# Altium PCB board_2.PcbDoc (part 2 of 4)
Units mm, origin at the board's own origin, x right, y up, seen from the top; angles counter-clockwise.
Board outline 144.25 x 129 mm, 8 copper layers (Top Layer, PWR, Layer2, Layer3, Layer4, Layer5, GND, Bottom Layer); 112 components, 273 nets, 1028 pads, 798 vias.
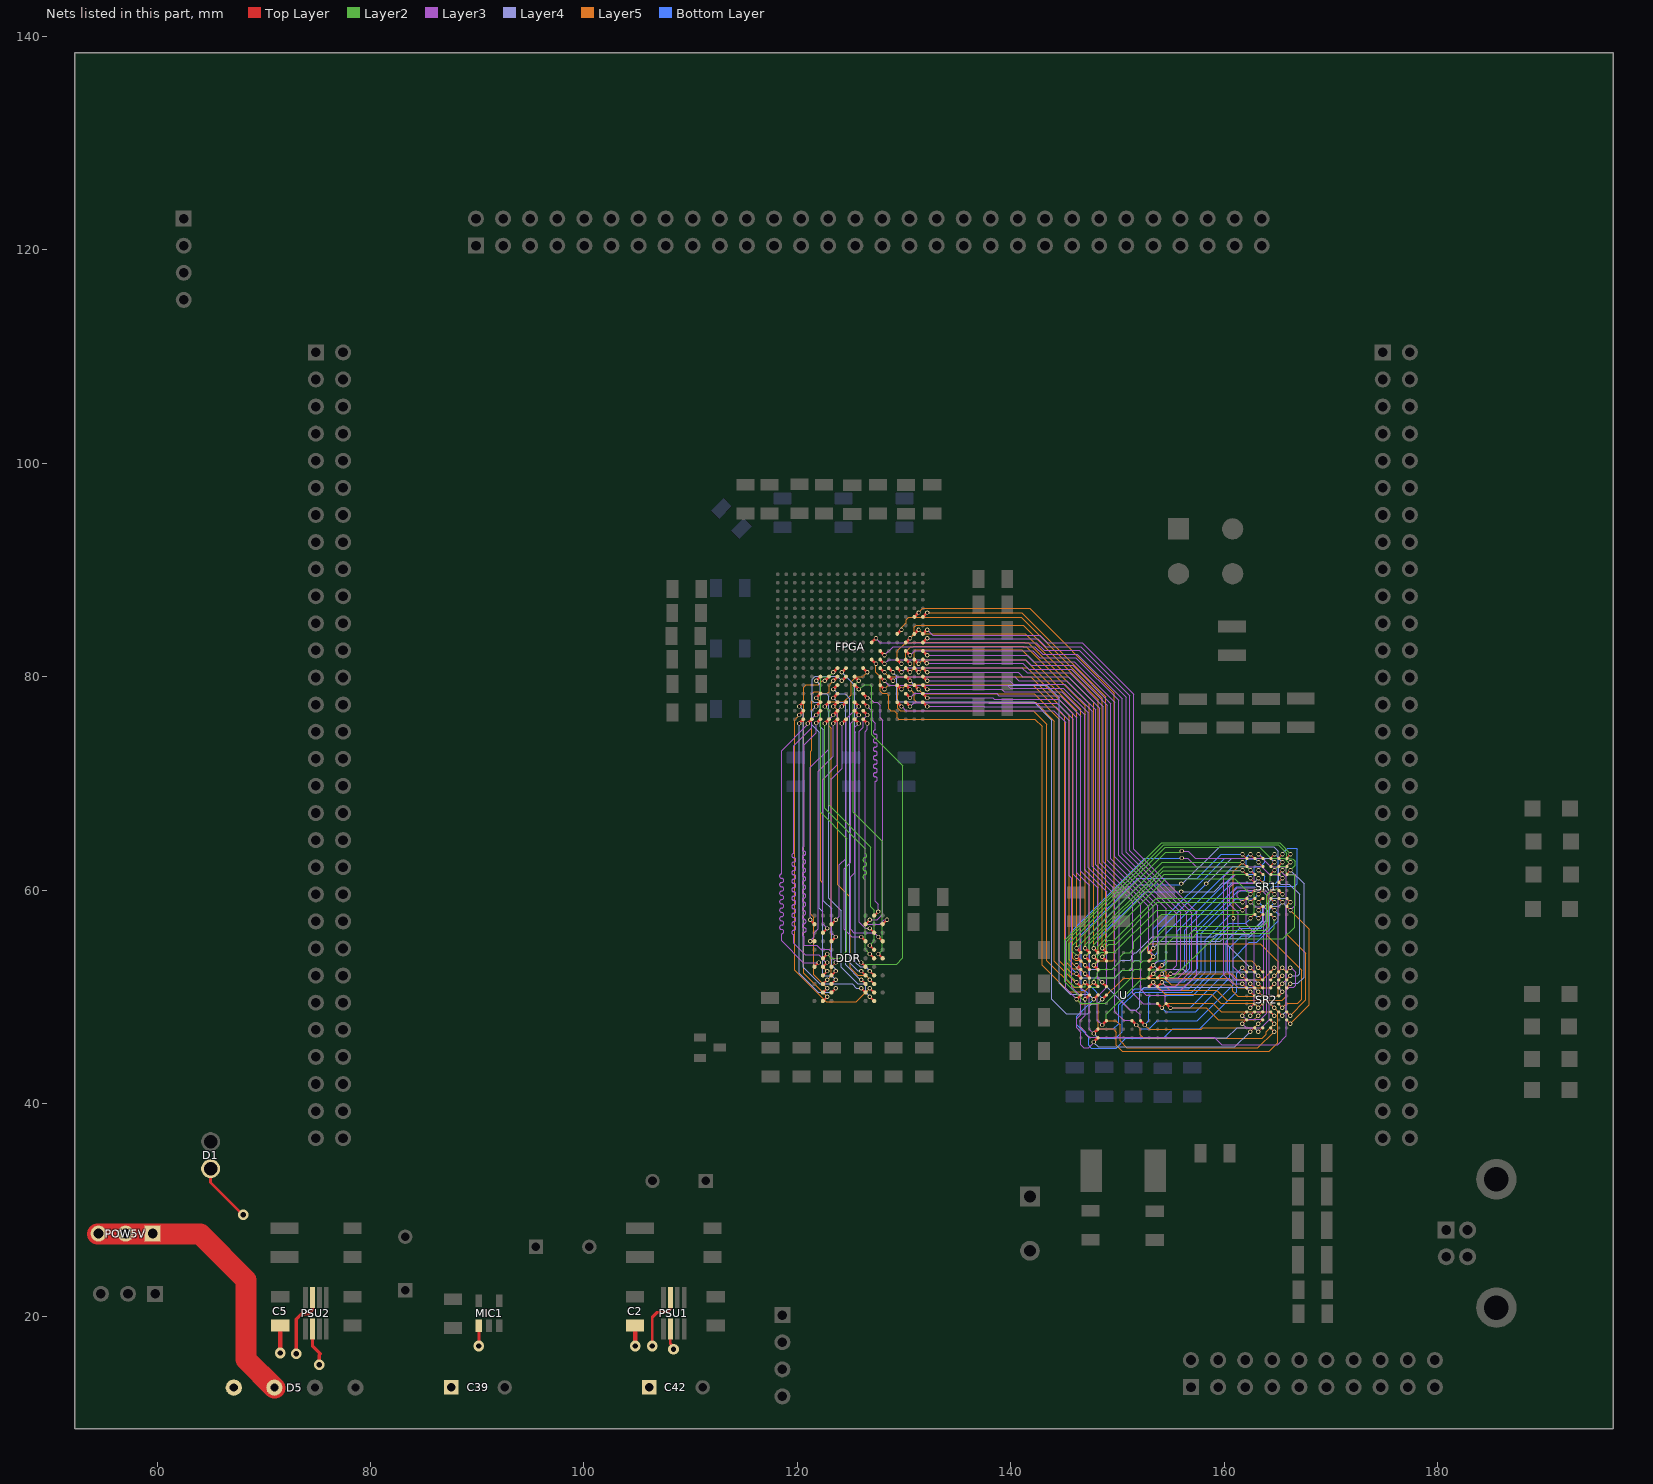
[diagram p8: the nets of this part, all layers, seen from the top]

## Via types
v1: diameter 0.4, hole 0.25, Top Layer to Bottom Layer, tented top, 553 vias
v2: diameter 1, hole 0.5, Top Layer to Bottom Layer, 222 vias
v3: diameter 1.27, hole 0.5, Top Layer to Bottom Layer, 12 vias
v4: diameter 0.4, hole 0.25, Top Layer to Bottom Layer, 7 vias
v5: diameter 7, hole 5, Top Layer to Bottom Layer, 4 vias

## Nets (pads, with @x,y where several pads share a name; then routed paths per layer and width w, separated by ;. In a path a pad name is that pad's centre, name@x,y a point inside that pad or via, vN(x,y) a via of type N, cw(c..) or ccw(c..) an arc to the next point about the centre after c; other vN are vias at no path point) (continued)
5V0: C2.2 C5.2 C39.1 C42.1 D1.1 D5.1 MIC1.1 PSU1.2 PSU1.7 PSU2.2 PSU2.7 | length 29.8
  Top Layer w0.254: D1.1@65,33.88 65,32.6 v2(68.05,29.55) ; v2(106.4,17.25) 106.4,19.95 106.869,20.419 107.833,20.419 108.056,20.642 108.056,21.481 PSU1.7@108.1,21.525 ; PSU1.2@108.1,19.125 108.1,17.475 108.35,17.225 108.4,17.175 v2(108.4,16.95)
  Top Layer w0.305: v2(73.025,16.525) 73.025,19.775 73.507,20.256 74.181,20.256 74.55,20.625 PSU2.7@74.55,21.525 ; PSU2.2@74.55,19.125 74.55,17.275 75.3,16.525 75.175,16.4 v2(75.175,15.5) ; v2(90.15,17.25) MIC1.1@90.15,19.15
  Top Layer w0.4: v2@71.5,16.625 71.525,16.65 C5.2@71.525,19.175 ; v2(104.8,17.25) C2.2@104.8,19.175
  other v2: 71.525,16.6
5V0_AC: D5.2 POW5V.1 POW5V.2 POW5V.3 | length 26.9
  Top Layer w2: POW5V.3@54.4,27.75 64.025,27.75 68.325,23.45 68.325,16 D5.2@70.975,13.35 D5.2@71,13.325
ADDR0: FPGA.V5 SR1.A3 SR2.A3 U.J4 | length 89.9
  Top Layer w0.1: SR2.A3@164.325,47.1 v1(164.7,46.725) ; SR1.A3@164.35,57.725 v1(164.725,57.35)
  Top Layer w0.254: FPGA.V5@131.768,79.204 v1(132.168,78.804) ; v1(148.575,47.35) U.J4@148.975,47.75
  Layer3 w0.1: v1(132.168,78.804) 139.171,78.804 139.401,78.574 144.793,78.574 146.92,76.447 146.92,61.922 149.025,59.817 149.025,50.9 148.125,50 148.125,47.8 v1(148.575,47.35)
  Layer2 w0.1: v1(148.575,47.35) 148.95,47.725 148.95,48.35 152.3,51.7 152.675,51.7 152.975,52 152.975,52.35 153.15,52.525 154.375,52.525 154.575,52.725 154.575,54.85 155.25,55.525 157.05,55.525 157.45,55.925 164.225,55.925 164.725,56.425 v1(164.725,57.35)
  Layer5 w0.1: v1@148.6,47.325 149.025,47.75 149.85,47.75 150.25,47.35 150.25,45.85 150.9,45.2 163.175,45.2 v1(164.7,46.725)
ADDR1: FPGA.V4 SR1.A4 SR2.A4 U.K3 | length 86.5
  Top Layer w0.1: v1(163.2,46.725) SR2.A4@163.575,47.1 ; v1(163.225,57.35) SR1.A4@163.6,57.725
  Top Layer w0.254: FPGA.V4@131.768,78.404 v1(132.168,78.004) ; v1(147.775,46.55) U.K3@148.175,46.95
  Layer3 w0.1: v1(132.168,78.004) 138.321,78.004 138.459,77.866 144.5,77.866 146.212,76.154 146.212,61.629 147.375,60.466 147.375,46.95 v1(147.775,46.55)
  Layer4 w0.1: v1(147.775,46.55) 148.175,46.15 160.275,46.15 161.225,47.1 162.825,47.1 v1@163.225,46.7
  Bottom Layer w0.1: v1@147.75,46.625 148.1,46.975 149.625,46.975 150.125,47.475 150.125,49.225 151.625,50.725 156.675,50.725 158.225,52.275 158.225,55.3 160.65,57.725 162.85,57.725 v1(163.225,57.35)
ADDR2: FPGA.V3 SR1.A5 SR2.A5 U.L3 | length 86.9
  Top Layer w0.1: v1(162.45,46.725) SR2.A5@162.825,47.1 ; v1(162.475,57.35) SR1.A5@162.85,57.725
  Top Layer w0.254: FPGA.V3@131.768,77.604 v1(132.168,77.204) ; v1(147.775,45.75) U.L3@148.175,46.15
  Layer3 w0.1: v1(132.168,77.204) 137.471,77.204 137.517,77.158 144.206,77.158 145.504,75.86 145.504,61.335 145.725,61.114 145.725,50.875 146.575,50.025 146.575,48.325 146.175,47.925 146.175,47.075 146.575,46.675 146.575,45.5 146.85,45.225 147.325,45.225 v1@147.825,45.725
  Layer4 w0.1: v1@147.75,45.75 148.2,45.3 161.025,45.3 v1(162.45,46.725)
  Bottom Layer w0.1: v1(147.775,45.75) 147.85,45.75 148.225,46.125 149.85,46.125 150.45,46.725 150.45,49.175 151.7,50.425 156.95,50.425 158.775,52.25 158.775,55.15 160.5,56.875 162.025,56.875 v1@162.5,57.35
ADDR3: FPGA.N6 SR1.B3 SR2.B3 U.J7 | length 88.8
  Top Layer w0.1: SR2.B3@164.325,47.85 v1(164.7,47.475) ; SR1.B3@164.35,58.475 v1(164.725,58.1)
  Top Layer w0.254: FPGA.N6@127.768,80.004 v1(128.168,79.604) ; U.J7@151.375,47.75 v1(151.775,47.35)
  Layer3 w0.1: v1(128.168,79.604) 128.572,79.2 139.675,79.2 139.947,78.928 144.939,78.928 147.274,76.593 147.274,62.068 149.775,59.567 149.775,48.6 150.575,47.8 151.325,47.8 v1(151.775,47.35)
  Layer5 w0.1: v1(151.775,47.35) 152.125,47 152.125,46.425 152.45,46.1 163.575,46.1 163.975,46.5 163.975,46.725 v1@164.7,47.45
  Bottom Layer w0.1: v1(151.775,47.35) 152.15,46.975 153,46.975 153.75,47.725 157.475,47.725 160.85,51.1 160.85,53.575 162.375,55.1 163.075,55.1 165.075,57.1 165.075,57.75 v1(164.725,58.1)
ADDR4: FPGA.V6 SR1.B4 SR2.B4 U.J8 | length 81
  Top Layer w0.1: v1(163.2,47.475) SR2.B4@163.575,47.85 ; v1(163.225,58.1) SR1.B4@163.6,58.475
  Top Layer w0.254: FPGA.V6@131.768,80.004 v1(132.168,79.604) ; U.J8@152.175,47.75 v1(152.575,47.35)
  Layer3 w0.1: v1(132.168,79.604) 139.896,79.604 140.218,79.282 145.086,79.282 147.628,76.74 147.628,62.215 150.175,59.668 150.175,49.775 151.163,48.787 151.637,48.787 152.125,48.3 152.125,47.8 v1(152.575,47.35)
  Layer5 w0.1: v1@152.575,47.325 152.975,46.925 157.875,46.925 158.025,47.075 162.8,47.075 v1(163.2,47.475)
  Bottom Layer w0.1: v1(152.575,47.35) 152.95,47.725 152.95,49.95 153.125,50.125 157.1,50.125 159.225,52.25 159.225,55.25 160.6,56.625 163.175,56.625 163.725,57.175 163.725,57.675 v1@163.275,58.125
ADDR5: FPGA.P6 SR1.C3 SR2.C3 U.G10 | length 82.6
  Top Layer w0.1: SR1.C3@164.35,59.225 v1(164.725,58.85) ; SR2.C3@164.363,48.562 v1(164.7,48.225)
  Top Layer w0.254: FPGA.P6@128.568,80.004 v1(128.968,79.604) ; U.G10@153.775,49.35 v1(154.175,48.95)
  Layer3 w0.1: v1(128.968,79.604) 129.368,80.004 140.371,80.004 140.739,79.636 145.233,79.636 147.982,76.887 147.982,62.362 151.425,58.919 151.425,50.325 152.425,49.325 153.8,49.325 v1(154.175,48.95)
  Layer5 w0.1: v1(154.175,48.95) 154.6,49.375 158.925,49.375 159.725,48.575 164.35,48.575 v1@164.675,48.25
  Bottom Layer w0.1: v1(154.175,48.95) v1@154.175,48.975 ; v1@154.2,48.925 154.525,48.6 157.35,48.6 160.525,51.775 160.525,54.6 161.65,55.725 163.35,55.725 164.3,56.675 164.3,58.4 v1@164.725,58.825
ADDR6: FPGA.V7 SR1.C4 SR2.C4 U.G11 | length 76.7
  Top Layer w0.1: v1(163.2,48.225) SR2.C4@163.575,48.6 ; v1(163.225,58.85) SR1.C4@163.6,59.225
  Top Layer w0.254: FPGA.V7@131.768,80.804 v1(132.168,80.404) ; U.G11@154.575,49.35 v1(154.975,48.95)
  Layer3 w0.1: v1(132.168,80.404) 140.721,80.404 141.135,79.99 145.379,79.99 148.336,77.033 148.336,62.508 152.175,58.669 152.175,50.675 152.7,50.15 154.325,50.15 154.5,49.975 154.5,49.425 v1(154.975,48.95)
  Layer5 w0.1: v1(154.975,48.95) 158.325,48.95 159.45,47.825 162.8,47.825 v1(163.2,48.225)
  Bottom Layer w0.1: v1(154.975,48.95) 156.85,48.95 160.225,52.325 160.225,55.175 161.45,56.4 163.425,56.4 164.075,57.05 164.075,58.075 v1@163.275,58.875
ADDR7: FPGA.V11 SR1.D4 SR2.D4 U.E9 | length 84.4
  Top Layer w0.1: v1(163.2,48.975) SR2.D4@163.575,49.35 ; v1(163.225,59.6) SR1.D4@163.6,59.975
  Top Layer w0.254: FPGA.V11@131.768,84.004 v1(132.168,84.404) ; U.E9@152.975,50.95 v1(153.375,51.35)
  Layer3 w0.1: v1(132.168,84.404) 132.672,83.9 142.702,83.9 143.426,83.176 146.699,83.176 151.522,78.353 151.522,63.828 157.425,57.925 157.425,52.075 155.95,50.6 153.95,50.6 153.375,51.175 v1(153.375,51.35)
  Layer5 w0.1: v1(153.375,51.35) 154.5,50.225 158.85,50.225 159.7,49.375 162.85,49.375 v1@163.25,48.975
  Bottom Layer w0.1: v1@153.375,51.325 153.75,50.95 156.375,50.95 157.85,52.425 157.85,55.95 161.1,59.2 162.825,59.2 v1(163.225,59.6)
ADDR8: FPGA.V10 SR1.H2 SR2.H2 U.E10 | length 94
  Top Layer w0.1: SR2.H2@165.075,52.35 v1(165.45,52.725) ; SR1.H2@165.1,62.975 v1(165.475,63.35)
  Top Layer w0.254: FPGA.V10@131.768,83.204 v1(132.168,83.604) ; U.E10@153.775,50.95 v1(154.175,51.35)
  Layer3 w0.1: v1(132.168,83.604) 132.226,83.546 142.555,83.546 143.279,82.822 146.552,82.822 151.168,78.206 151.168,63.681 156.975,57.874 156.975,52.5 155.45,50.975 154.55,50.975 v1(154.175,51.35)
  Layer5 w0.1: v1(154.175,51.35) 154.9,50.625 159.3,50.625 160.275,49.65 165.475,49.65 165.8,49.975 165.8,52.4 v1@165.475,52.725
  Bottom Layer w0.1: v1(154.175,51.35) 154.225,51.4 156.275,51.4 157.525,52.65 157.525,56.125 161.35,59.95 164.175,59.95 164.575,60.35 166.625,60.35 166.875,60.6 166.875,63.825 166.8,63.9 165.95,63.9 v1@165.425,63.375
ADDR9: FPGA.N9 SR1.H3 SR2.H3 U.D11 | length 84.2
  Top Layer w0.1: SR2.H3@164.325,52.35 v1(164.7,52.725) ; SR1.H3@164.35,62.975 v1(164.725,63.35)
  Top Layer w0.254: FPGA.N9@127.768,82.404 v1(128.168,82.004) ; U.D11@154.575,51.75 v1(154.975,52.15)
  Layer3 w0.1: v1(128.168,82.004) 128.989,82.825 142.275,82.825 142.986,82.114 146.259,82.114 150.46,77.913 150.46,63.388 155.925,57.923 155.925,52.65 155.425,52.15 v1(154.975,52.15)
  Layer5 w0.1: v1(154.975,52.15) 160.75,52.15 161.3,51.6 163.65,51.6 v1@164.775,52.725
  Bottom Layer w0.1: v1(154.975,52.15) 156.25,52.15 156.775,52.675 156.775,55.9 161.175,60.3 163.7,60.3 164.05,60.65 164.825,60.65 165.075,60.9 165.075,63.075 v1@164.775,63.375
ADDR10: FPGA.V9 SR1.H4 SR2.H4 U.C10 | length 74.4
  Top Layer w0.1: v1(163.2,52.725) SR2.H4@163.575,52.35 ; v1(163.225,63.35) SR1.H4@163.6,62.975
  Top Layer w0.254: FPGA.V9@131.768,82.404 v1(132.168,82.004) ; U.C10@153.775,52.55 v1(154.175,52.95)
  Layer3 w0.1: v1(132.168,82.004) 141.546,82.004 142.144,81.406 145.966,81.406 149.752,77.62 149.752,63.095 154.6,58.247 154.6,53.375 v1(154.175,52.95)
  Layer5 w0.1: v1(154.175,52.95) 154.575,53.35 162.575,53.35 v1(163.2,52.725)
  Bottom Layer w0.1: v1(154.175,52.95) 154.375,52.95 154.775,53.35 155.475,53.35 155.6,53.475 155.6,56.125 160.95,61.475 162.7,61.475 162.825,61.6 162.825,62.125 162.95,62.25 163.425,62.25 163.8,62.625 163.8,62.875 v1@163.275,63.4
ADDR11: FPGA.V8 SR1.H5 SR2.H5 U.A9 | length 69.2
  Top Layer w0.1: v1(162.45,52.725) SR2.H5@162.825,52.35 ; v1(162.475,63.35) SR1.H5@162.85,62.975
  Top Layer w0.254: FPGA.V8@131.768,81.604 v1(132.122,81.25) ; U.A9@152.975,54.15 v1(153.375,54.55)
  Layer3 w0.1: v1(132.122,81.25) 141.151,81.25 141.703,80.698 145.673,80.698 149.044,77.327 149.044,62.802 153.375,58.471 v1(153.375,54.55)
  Layer4 w0.1: v1(153.375,54.55) 153.8,54.975 160.225,54.975 v1@162.475,52.725
  Bottom Layer w0.1: v1(153.375,54.55) 153.375,56.3 160.075,63 162,63 162.375,63.375 v1@162.475,63.375
ADDR12: FPGA.R7 SR1.G3 SR2.G3 U.B9 | length 80.6
  Top Layer w0.1: SR2.G3@164.325,51.6 v1(164.7,51.975) ; SR1.G3@164.35,62.225 v1(164.725,62.6)
  Top Layer w0.254: FPGA.R7@129.368,80.804 v1(129.768,80.404) ; U.B9@152.975,53.35 v1(153.375,53.75)
  Layer3 w0.1: v1(129.768,80.404) 130.214,80.85 141.05,80.85 141.556,80.344 145.526,80.344 148.69,77.18 148.69,62.655 152.925,58.42 152.925,54.375 153.375,53.925 v1(153.375,53.75)
  Layer5 w0.1: v1@153.375,53.725 152.85,54.25 152.85,54.775 153.05,54.975 163.4,54.975 165.1,53.275 165.1,52.325 v1@164.75,51.975
  Layer4 w0.1: v4@158.325,60.45 v4@158.325,60.55 ; v4@158.375,60.5 158.375,60.65 160.7,62.975 164.35,62.975 v1@164.75,62.575
  Bottom Layer w0.1: v1(153.375,53.75) 153.825,54.2 153.825,56.1 158.275,60.55 v4@158.325,60.55
  other v4: 158.325,60.6
ADDR13: FPGA.N8 SR1.G4 SR2.G4 U.C9 | length 77.9
  Top Layer w0.1: v1(163.2,51.975) SR2.G4@163.575,51.6 ; v1(163.225,62.6) SR1.G4@163.6,62.225
  Top Layer w0.254: FPGA.N8@127.768,81.604 v1(128.168,81.204) ; U.C9@152.975,52.55 v1(153.375,52.95)
  Layer3 w0.1: v1(128.168,81.204) 128.568,81.604 141.396,81.604 141.948,81.052 145.819,81.052 149.398,77.473 149.398,62.948 153.8,58.546 153.8,53.375 v1(153.375,52.95)
  Layer4 w0.1: v1@153.4,52.95 153.775,52.575 156.175,52.575 156.4,52.35 162.825,52.35 v1(163.2,51.975)
  Bottom Layer w0.1: v1(153.375,52.95) 153.8,53.375 154.4,53.375 154.575,53.55 154.575,55.95 160.85,62.225 161.975,62.225 162.1,62.35 162.1,62.8 162.25,62.95 162.925,62.95 v1@163.275,62.6
ADDR14: FPGA.T9 SR1.F3 SR2.F3 U.D9 | length 88.9
  Top Layer w0.1: SR2.F3@164.325,50.85 SR2.F3@164.338,50.863 ; SR1.F3@164.35,61.475 v1(164.725,61.85) ; SR2.F3@164.375,50.825 164.375,50.875 v1@164.725,51.225
  Top Layer w0.254: FPGA.T9@130.168,82.404 v1(130.568,82.004) ; U.D9@152.975,51.75 v1(153.375,52.15)
  Layer3 w0.1: v1(130.568,82.004) 130.989,82.425 142.075,82.425 142.74,81.76 146.112,81.76 150.106,77.766 150.106,63.241 155.55,57.797 155.55,52.95 155.175,52.575 153.8,52.575 v1(153.375,52.15)
  Layer2 w0.1: v1(153.375,52.15) 153.725,51.8 155.3,51.8 158.925,55.425 165.525,55.425 166.625,56.525 166.625,61.4 166.575,61.45 166.075,61.45 165.85,61.675 165.85,62.175 165.8,62.225 165.1,62.225 v1@164.75,61.875
  Layer5 w0.1: v1(153.375,52.15) 153.75,52.525 154.35,52.525 154.6,52.275 154.6,52.025 154.9,51.725 160.475,51.725 160.925,51.275 161.35,50.85 164.325,50.85 v1(164.7,51.225)
  Bottom Layer w0.1: v1@164.65,61.825 v1@164.75,61.825
ADDR15: FPGA.M10 SR1.F4 SR2.F4 U.D10 | length 84.4
  Top Layer w0.1: v1(163.2,51.225) SR2.F4@163.575,50.85 ; v1(163.225,61.85) SR1.F4@163.6,61.475
  Top Layer w0.254: FPGA.M10@126.968,83.204 v1(127.368,83.604) ; U.D10@153.775,51.75 v1(154.175,52.15)
  Layer3 w0.1: v1(127.368,83.604) 127.78,83.192 142.409,83.192 143.133,82.468 146.406,82.468 150.814,78.06 150.814,63.535 156.5,57.849 156.5,52.55 155.725,51.775 154.55,51.775 v1(154.175,52.15)
  Layer4 w0.1: v1@154.175,52.15 154.75,51.575 162.85,51.575 v1(163.2,51.225)
  Bottom Layer w0.1: v1(154.175,52.15) 154.575,52.55 156.025,52.55 156.325,52.85 156.325,56.25 160.775,60.7 163.55,60.7 163.825,60.975 163.825,61.3 v1@163.25,61.875
ADDR16: FPGA.T4 SR1.E4 SR2.E4 U.E4 | length 84.3
  Top Layer w0.1: v1(163.2,50.475) SR2.E4@163.575,50.1 ; v1(163.225,61.1) SR1.E4@163.6,60.725
  Top Layer w0.254: FPGA.T4@130.168,78.404 v1(130.568,78.004) ; v1(148.575,51.35) U.E4@148.975,50.95
  Layer3 w0.1: v1(130.568,78.004) 130.989,78.425 138.675,78.425 138.88,78.22 144.646,78.22 146.566,76.3 146.566,61.775 148.15,60.191 148.15,51.775 v1(148.575,51.35)
  Layer4 w0.1: v1@148.55,51.4 151.2,48.75 151.775,48.75 152.075,49.05 152.075,50.45 152.5,50.875 162.8,50.875 v1@163.25,50.425 ; v4(156,59.85) 159.075,59.85 159.25,60.025 159.9,60.675 ; 159.9,60.7 162.825,60.7 v1(163.225,61.1)
  Bottom Layer w0.1: v1(148.575,51.35) 148.175,51.75 148.175,55.425 152.6,59.85 v4@155.975,59.85
ADDR17: FPGA.R3 SR1.D3 SR2.D3 U.F1 | length 97
  Top Layer w0.1: SR2.D3@164.325,49.35 v1(164.7,48.975) ; SR1.D3@164.35,59.975 v1(164.725,59.6)
  Top Layer w0.254: FPGA.R3@129.368,77.604 v1(129.768,77.204) ; v1(146.175,49.75) U.F1@146.575,50.15
  Layer3 w0.1: v1(129.768,77.204) 130.168,76.804 144.06,76.804 145.15,75.714 145.15,50.775 v1(146.175,49.75)
  Layer2 w0.1: v1(146.175,49.75) 146.55,49.375 148.9,49.375 151.225,51.7 ; 151.2,51.675 151.4,51.875 151.4,52.3 151.65,52.55 152.1,52.55 152.2,52.65 152.2,53.125 152.425,53.35 153.675,53.35 153.825,53.5 153.825,55.025 154.625,55.825 156.1,55.825 ; 156.125,55.825 156.725,55.825 157.15,56.25 163.9,56.25 164.2,56.55 164.2,59.05 v1@164.725,59.575
  Layer5 w0.1: v1@146.2,49.7 146.55,49.35 148.1,49.35 148.225,49.225 148.225,47.125 148.375,46.975 149.625,46.975 149.912,46.688 149.912,45.438 150.475,44.875 164.225,44.875 165.05,45.7 165.05,48.65 v1@164.7,49
ADDR18: FPGA.T3 SR1.H1 SR2.H1 U.F2 | length 107.5
  Top Layer w0.1: SR2.H1@165.825,52.35 v1(166.2,52.725) ; SR1.H1@165.85,62.975 v1(166.225,63.35)
  Top Layer w0.254: FPGA.T3@130.168,77.604 v1(130.568,77.204) ; v1(146.975,49.75) U.F2@147.375,50.15
  Layer3 w0.1: v1(130.568,77.204) 130.939,77.575 137.9,77.575 137.963,77.512 144.353,77.512 145.858,76.007 145.858,61.482 146.525,60.815 146.525,50.9 146.975,50.45 v1(146.975,49.75) 146.975,48.25 146.5,47.775 146.5,47.2 147.025,46.675 147.025,46.475 147.325,46.175 159.1,46.175 159.775,45.5 165.025,45.5 165.85,46.325 165.85,50.625 166.1,50.875 166.55,50.875 166.725,51.05 166.725,52.275 v1@166.2,52.8
  Layer2 w0.1: v1(146.975,49.75) 146.7,49.75 145.05,51.4 145.05,55.3 154.175,64.425 165.2,64.425 v1@166.25,63.375
ADDR19: FPGA.T6 SR1.H6 SR2.H6 U.F3 | length 96.4
  Top Layer w0.1: v1(161.7,52.725) SR2.H6@162.075,52.35 ; v1(161.725,63.35) SR1.H6@162.1,62.975
  Top Layer w0.254: FPGA.T6@130.168,80.004 v1(130.568,79.604) ; v1(147.775,49.75) U.F3@148.175,50.15
  Layer4 w0.1: v1(130.568,79.604) 130.972,79.2 143.375,79.2 144.55,78.025 144.55,51.275 145.6,50.225 147.325,50.225 v1@147.75,49.8
  Bottom Layer w0.1: 146.2,47.375 147.325,46.25 147.325,45.425 147.575,45.175 149.875,45.175 150.8,46.1 154.3,46.1 155.2,47 157.7,47 161.175,50.475 161.175,52.2 v1(161.7,52.725) ; 146.2,47.4 146.2,48.175 v1(147.775,49.75) 146.925,50.6 146.625,50.6 146.625,55.8 151.95,61.125 157.475,61.125 159.725,63.375 v1@161.75,63.375
ADDR20: FPGA.P7 SR1.G2 SR2.G2 U.F4 | length 101.9
  Top Layer w0.1: SR2.G2@165.075,51.6 v1(165.45,51.975) ; SR1.G2@165.1,62.225 v1(165.475,62.6)
  Top Layer w0.254: FPGA.P7@128.568,80.804 v1(128.968,80.404) ; v1(148.575,49.75) U.F4@148.975,50.15
  Layer5 w0.1: v1(148.575,49.75) 150.575,51.75 154.4,51.75 155.05,51.1 160.575,51.1 160.8,50.875 160.8,50.525 161.275,50.05 164.925,50.05 165.075,50.2 165.075,51.6 v1(165.45,51.975)
  Layer4 w0.1: v1(128.968,80.404) 128.968,80.382 129.325,80.025 129.325,77.825 129.525,77.625 142.15,77.625 143.85,75.925 143.85,49.75 145.2,48.4 147.225,48.4 147.375,48.55 147.375,49.125 147.6,49.35 148.175,49.35 v1(148.575,49.75) ; v4(156,60.6) 156,60.475 159.6,64.075 164.675,64.075 165.1,63.65 165.1,62.975 v1@165.5,62.575
  Bottom Layer w0.1: v1(148.575,49.75) 148.575,49.875 147.4,51.05 147.4,55.85 152.05,60.5 v4@155.875,60.5
DATA0: FPGA.V13 SR1.B6 SR2.B6 U.B4 | length 82.4
  Top Layer w0.1: v1(161.7,47.475) SR2.B6@162.075,47.85 ; v1(161.725,58.1) SR1.B6@162.1,58.475
  Top Layer w0.254: FPGA.V13@131.768,85.604 v1(132.168,86.004) ; v1(148.575,53.75) U.B4@148.975,53.35
  Layer3 w0.1: v1(161.7,47.475) 162.1,47.075 163.5,47.075 164.25,47.825 164.25,59.625 163.65,60.225 161.25,60.225 160.9,59.875 160.9,58.9 161.7,58.1 v1@161.75,58.1
  Layer2 w0.1: v1(148.575,53.75) 148.675,53.75 149.075,54.15 149.725,54.15 153.675,58.1 v1@161.75,58.1
  Layer5 w0.1: v1(132.168,86.004) 141.049,86.004 148.929,78.124 148.929,54.104 v1(148.575,53.75)
DATA1: FPGA.R11 SR1.C5 SR2.C5 U.A4 | length 76.8
  Top Layer w0.1: v1(162.45,48.225) SR2.C5@162.825,48.6 ; v1(162.475,58.85) SR1.C5@162.85,59.225
  Top Layer w0.254: FPGA.R11@129.368,84.004 v1(129.768,84.404) ; v1(148.575,54.55) U.A4@148.975,54.15
  Layer3 w0.1: v1(162.45,48.225) 162.8,48.575 163.5,48.575 163.7,48.775 163.7,58.275 163.525,58.45 162.925,58.45 v1@162.55,58.825
  Layer2 w0.1: v1(148.575,54.55) 148.575,54.725 149.125,55.275 149.7,55.275 ; 149.7,55.3 153.65,59.25 162.075,59.25 v1(162.475,58.85)
  Layer5 w0.1: v1(129.768,84.404) 129.768,84.609 130.218,85.059 130.218,85.349 130.444,85.575 140.972,85.575 148.571,77.976 148.571,54.554 v1(148.575,54.55)
DATA2: FPGA.U13 SR1.C6 SR2.C6 U.C3 | length 85.9
  Top Layer w0.1: v1(161.7,48.225) SR2.C6@162.075,48.6 ; v1(161.725,58.85) SR1.C6@162.1,59.225
  Top Layer w0.254: FPGA.U13@130.968,85.604 v1(131.368,86.004) ; v1(147.775,52.95) U.C3@148.175,52.55
  Layer3 w0.1: v1@161.725,48.225 162.075,47.875 163.45,47.875 164.025,48.45 164.025,59.5 163.525,60 161.55,60 161.225,59.675 161.225,59.35 v1(161.725,58.85)
  Layer2 w0.1: v1@147.775,52.975 148.175,53.375 148.175,53.85 148.5,54.175 148.75,54.175 148.975,54.4 148.975,54.7 149.2,54.925 149.825,54.925 153.75,58.85 v1(161.725,58.85)
  Layer5 w0.1: v1(131.368,86.004) 131.768,86.404 141.775,86.404 149.725,78.454 149.725,53.5 149.575,53.35 148.225,53.35 147.825,52.95 v1(147.775,52.95)
DATA3: FPGA.T10 SR1.D5 SR2.D5 U.B3 | length 77.8
  Top Layer w0.1: v1(162.45,48.975) SR2.D5@162.825,49.35 ; v1(162.475,59.6) SR1.D5@162.85,59.975
  Top Layer w0.254: FPGA.T10@130.168,83.204 v1(130.568,83.604) ; v1(147.775,53.75) U.B3@148.175,53.35
  Layer3 w0.1: v1(162.45,48.975) 162.825,49.35 162.825,56.062 162.1,56.787 162.1,59.275 v1@162.45,59.625
  Layer2 w0.1: v1(147.775,53.75) 148.15,54.125 148.15,54.675 154.525,61.05 161.025,61.05 v1(162.475,59.6)
  Layer5 w0.1: v1(130.568,83.604) 130.968,84.004 130.968,84.668 131.125,84.825 141.197,84.825 148.2,77.822 148.2,54.175 v1(147.775,53.75)
DATA4: FPGA.U11 SR1.E5 SR2.E5 U.A3 | length 76.6
  Top Layer w0.1: v1(162.45,50.475) SR2.E5@162.825,50.1 ; v1(162.475,61.1) SR1.E5@162.85,60.725
  Top Layer w0.254: FPGA.U11@130.968,84.004 v1(131.368,84.404) ; v1(147.775,54.55) U.A3@148.175,54.15
  Layer3 w0.1: v1@162.45,50.425 162.1,50.775 162.1,51.325 161.825,51.6 161.1,51.6 160.35,52.35 160.35,60.75 161.1,61.5 162.125,61.5 162.475,61.15 v1(162.475,61.1)
  Layer2 w0.1: v1(147.775,54.55) 147.775,54.85 154.4,61.475 162.1,61.475 v1(162.475,61.1)
  Layer5 w0.1: v1(131.368,84.404) 131.747,84.025 141.371,84.025 147.775,77.621 v1(147.775,54.55)
DATA5: FPGA.T8 SR1.F5 SR2.F5 U.A2 | length 78.1
  Top Layer w0.1: v1(162.45,51.225) SR2.F5@162.825,50.85 ; v1(162.475,61.85) SR1.F5@162.85,61.475
  Top Layer w0.254: FPGA.T8@130.168,81.604 v1(130.568,81.204) ; v1(146.975,54.55) U.A2@147.375,54.15
  Layer3 w0.1: v1(162.45,51.225) 162.45,51.425 162.1,51.775 162.1,55.85 161.35,56.6 161.35,57.85 160.55,58.65 160.55,60.25 160.925,60.625 162.675,60.625 162.85,60.8 162.85,61.525 v1@162.475,61.9
  Layer2 w0.1: v1(146.975,54.55) 146.975,54.85 154.325,62.2 162.15,62.2 v1@162.475,61.875
  Layer5 w0.1: v1(130.568,81.204) 130.175,81.597 130.175,82.35 130.65,82.825 130.888,82.825 130.917,82.854 141.162,82.854 141.191,82.825 141.44,82.825 146.975,77.29 v1(146.975,54.55)
DATA6: FPGA.R8 SR1.F6 SR2.F6 U.B2 | length 80
  Top Layer w0.1: v1(161.7,51.225) SR2.F6@162.075,50.85 ; v1(161.725,61.85) SR1.F6@162.1,61.475
  Top Layer w0.254: FPGA.R8@129.368,81.604 v1(129.768,81.204) ; v1(146.975,53.75) U.B2@147.375,53.35
  Layer3 w0.1: v1(161.7,51.225) 160.8,51.225 159.975,52.05 159.975,61.25 160.6,61.875 v1@161.75,61.875
  Layer2 w0.1: v1@146.975,53.775 147.375,54.175 147.375,54.9 154.3,61.825 161.7,61.825 v1(161.725,61.85)
  Layer5 w0.1: v1(129.768,81.204) 129.375,81.597 129.375,82.425 130.142,83.192 130.755,83.192 130.771,83.208 141.308,83.208 141.324,83.192 141.639,83.192 147.375,77.456 147.375,54.075 147.05,53.75 v1(146.975,53.75)
DATA7: FPGA.U8 SR1.G6 SR2.G6 U.A1 | length 71.6
  Top Layer w0.1: v1(161.7,51.975) SR2.G6@162.075,51.6 ; v1(161.725,62.6) SR1.G6@162.1,62.225
  Top Layer w0.254: FPGA.U8@130.968,81.604 v1(131.368,81.204) ; v1(146.175,54.55) U.A1@146.575,54.15
  Layer3 w0.1: v1(160.875,57.35) 160.875,52.8 v1(161.7,51.975)
  Layer2 w0.1: v1@146.15,54.525 154.225,62.6 v1(161.725,62.6)
  Layer5 w0.1: v1(131.368,81.204) 131.768,81.604 141.381,81.604 146.175,76.81 v1(146.175,54.55) ; v1(160.875,57.35) 160.875,61.725 v1@161.725,62.575
DATA8: FPGA.T7 SR1.B1 SR2.B1 U.B1 | length 88
  Top Layer w0.1: SR2.B1@165.825,47.85 v1(166.2,47.475) ; SR1.B1@165.85,58.475 v1(166.225,58.1)
  Top Layer w0.254: FPGA.T7@130.168,80.804 v1(130.568,80.404) ; v1(146.175,53.75) U.B1@146.575,53.35
  Layer3 w0.1: v4@156.05,63.625 156.65,63.625 157.3,62.975 163.6,62.975 164.375,62.2 165.675,62.2 165.85,62.025 165.85,61.675 166.05,61.475 166.625,61.475 166.675,61.425 166.675,58.55 v1@166.275,58.15
  Layer2 w0.1: v1(146.175,53.75) 146.175,53.875 145.775,54.275 145.775,54.775 154.525,63.525 155.9,63.525 v4(156.025,63.65)
  Layer5 w0.1: v1(130.568,80.404) 130.975,80.811 130.975,82.411 131.064,82.5 141.015,82.5 146.55,76.965 146.55,54.1 146.2,53.75 v1(146.175,53.75) ; v1(166.225,58.1) 168,56.325 168,49.25 v1@166.25,47.5
DATA9: FPGA.U7 SR1.C1 SR2.C1 U.C2 | length 78.3
  Top Layer w0.1: SR1.C1@165.85,59.225 v1(166.225,58.85) ; SR2.C1@165.863,48.562 v1(166.2,48.225)
  Top Layer w0.254: FPGA.U7@130.968,80.804 v1(131.368,80.404) ; v1(146.975,52.95) U.C2@147.375,52.55
  Layer5 w0.1: v1(131.368,80.404) 131.789,80.825 141.56,80.825 145.821,76.564 145.821,53.603 146.028,53.396 146.529,53.396 v1(146.975,52.95) ; v1(166.2,48.225) 167.675,49.7 167.675,54.075 165.875,55.875 165.875,58.575 v1@166.2,58.9
  Layer4 w0.1: v1@146.95,52.975 147.35,52.575 149.5,52.575 150.325,53.4 ; 150.3,53.4 150.325,53.4 ; v1(166.225,58.85) 165.85,59.225 164.55,59.225 163.625,58.3 163.625,57.15 162.35,55.875 159.25,55.875 159,55.625 153.275,55.625 151.775,54.125 151.625,54.125 151.35,53.85 151.35,53.55 151.2,53.4 150.325,53.4
DATA10: FPGA.N7 SR1.C2 SR2.C2 U.C1 | length 80.2
  Top Layer w0.1: SR2.C2@165.075,48.6 v1(165.45,48.225) ; SR1.C2@165.1,59.225 v1(165.475,58.85)
  Top Layer w0.254: FPGA.N7@127.768,80.804 v1(128.168,80.404) ; v1(146.175,52.95) U.C1@146.575,52.55
  Layer5 w0.1: v1(128.168,80.404) 128.572,80 141.86,80 145.467,76.393 145.467,53.457 145.974,52.95 v1(146.175,52.95)
  Layer4 w0.1: v1(146.175,52.95) 146.175,52.65 146.55,52.275 146.55,51.95 146.725,51.775 149.75,51.775 150.475,52.5 151.25,52.5 151.4,52.65 151.4,53.175 151.625,53.4 152.15,53.4 152.225,53.475 152.225,54.125 153.275,55.175 159.65,55.175 159.95,55.475 162.275,55.475 163.975,57.175 163.975,57.9 164.575,58.5 165.15,58.5 v1@165.525,58.875 ; v1@165.45,48.25 165.825,48.625 165.825,51.094 165.846,51.115 165.846,56.01 165.825,56.031 165.825,58.5 165.487,58.837 v1(165.475,58.85)
DATA11: FPGA.R5 SR1.D2 SR2.D2 U.D2 | length 85.1
  Top Layer w0.1: SR1.D2@165.1,59.975 v1(165.475,59.6) ; SR2.D2@165.112,49.312 v1(165.45,48.975)
  Top Layer w0.254: FPGA.R5@129.368,79.204 v1(129.768,78.804) ; v1(146.975,52.15) U.D2@147.375,51.75
  Layer2 w0.1: v1(146.975,52.15) 147.375,51.75 147.375,51.025 147.5,50.9 147.975,50.9 148.2,51.125 148.2,51.575 148.225,51.575 148.425,51.775 149.7,51.775 150.425,52.5 151.075,52.5 151.4,52.825 151.4,53.125 151.625,53.35 152.075,53.35 152.2,53.475 152.2,54.15 154.675,56.625 163.625,56.625 164,57 164,59.55 164.525,60.075 164.975,60.075 v1@165.475,59.575
  Layer5 w0.1: v1(129.768,78.804) 130.189,79.225 142.08,79.225 145.075,76.23 145.075,53.348 145.827,52.596 146.529,52.596 v1(146.975,52.15) ; v1(165.45,48.975) 165.875,49.4 166.925,49.4 167.275,49.75 167.275,52.475 164.05,55.7 164.05,59.525 164.625,60.1 165.025,60.1 v1@165.5,59.625
DATA12: FPGA.U5 SR1.E2 SR2.E2 U.D1 | length 79.9
  Top Layer w0.1: SR1.E2@165.1,60.725 v1(165.475,61.1) ; SR2.E2@165.125,50.05 165.45,50.375 v1(165.45,50.475)
  Top Layer w0.254: FPGA.U5@130.968,79.204 v1(131.368,78.804) ; v1(146.175,52.15) U.D1@146.575,51.75
  Layer3 w0.1: v4(156.025,63) 156.575,63 157.375,62.2 163.525,62.2 164.275,61.45 165.175,61.45 v1@165.5,61.125 ; v1(165.45,50.475) 165.1,50.825 165.1,60.725 v1@165.45,61.075
  Layer5 w0.1: v1(131.368,78.804) 131.368,78.782 131.775,78.375 142.223,78.375 144.575,76.023 144.575,53.348 145.772,52.15 v1(146.175,52.15)
  Bottom Layer w0.1: v1(146.175,52.15) 145.675,52.65 145.675,56.075 152.575,62.975 155.9,62.975 v4@156.05,63.125
DATA13: FPGA.M8 SR1.F2 SR2.F2 U.E3 | length 86.5
  Top Layer w0.1: SR2.F2@165.075,50.85 v1(165.45,51.225) ; SR1.F2@165.1,61.475 v1(165.475,61.85)
  Top Layer w0.254: FPGA.M8@126.968,81.604 v1(127.368,81.204) ; v1(147.775,51.35) U.E3@148.175,50.95
  Layer3 w0.1: v1(165.45,51.225) 165.825,51.6 165.825,61.25 165.475,61.6 v1@165.475,61.875
  Layer2 w0.1: v1(147.775,51.35) 147.775,51.6 148.125,51.95 148.125,52.25 148.45,52.575 149.5,52.575 150.262,53.337 150.262,53.737 150.65,54.125 151.15,54.125 151.55,54.525 151.55,55.15 154.15,57.75 162.675,57.75 162.825,57.9 162.825,59.925 163.219,60.319 163.844,60.319 164.35,60.825 164.35,61.35 164.5,61.5 165.15,61.5 v1@165.5,61.85
  Layer5 w0.1: v1(127.368,81.204) 127.368,80.407 127.775,80 127.775,78.625 127.975,78.425 128.375,78.425 128.575,78.225 128.575,77 128.75,76.825 129.075,76.825 129.375,76.525 129.375,76.125 129.475,76.025 142.275,76.025 142.95,75.35 142.95,52.95 145.425,50.475 146.9,50.475 v1(147.775,51.35)
DATA14: FPGA.N5 SR1.F1 SR2.F1 U.E2 | length 92.1
  Top Layer w0.1: SR2.F1@165.825,50.85 v1(166.2,51.225) ; SR1.F1@165.85,61.475 v1(166.225,61.85)
  Top Layer w0.254: FPGA.N5@127.768,79.204 v1(128.168,78.804) ; v1(146.975,51.35) U.E2@147.375,50.95
  Layer2 w0.1: v1(146.975,51.35) 146.975,50.95 145.975,50.95 145.275,51.65 145.275,55.175 154.325,64.225 165.1,64.225 165.875,63.45 165.875,63.175 166.1,62.95 166.4,62.95 166.475,62.875 166.675,62.675 166.675,62.3 v1(166.225,61.85)
  Layer5 w0.1: v1(128.168,78.804) 128.539,79.175 129.15,79.175 129.4,78.925 129.4,77.05 129.625,76.825 142.111,76.825 143.4,75.536 143.4,53.375 145.9,50.875 146.5,50.875 v1(146.975,51.35)
  Layer4 w0.1: v1@166.225,51.25 166.925,51.25 167.5,51.825 167.5,60.575 v1(166.225,61.85)
DATA15: FPGA.T5 SR1.G1 SR2.G1 U.E1 | length 85.3
  Top Layer w0.1: SR2.G1@165.825,51.6 v1(166.2,51.975) ; SR1.G1@165.85,62.225 v1(166.225,62.6)
  Top Layer w0.254: FPGA.T5@130.168,79.204 v1(130.568,78.804) ; v1(146.175,51.35) U.E1@146.575,50.95
  Layer2 w0.1: v1(146.175,51.35) 145.475,52.05 145.475,55 154.5,64.025 163.325,64.025 164.375,62.975 165.65,62.975 166.05,62.575 v1@166.225,62.575
  Layer5 w0.1: v1@130.575,78.8 130.95,78.425 130.95,77.825 131.175,77.6 142.326,77.6 144.1,75.826 144.1,53.322 146.072,51.35 v1(146.175,51.35)
  Layer4 w0.1: v1(166.2,51.975) 166.9,51.975 167.075,52.15 167.075,59.6 166.125,60.55 165.325,60.55 165.125,60.75 165.125,62.125 165.225,62.225 165.85,62.225 v1@166.275,62.65
DDR2.DDR_A0: DDR.H8 FPGA.J7 | length 30.5
  Top Layer w0.2: v1(126.8,52.4) DDR.H8@127.2,52
  Top Layer w0.254: v1(124.168,80.404) FPGA.J7@124.568,80.804
  Layer4 w0.1: v1@124.175,80.4 125.375,79.2 125.375,74.875 125.45,74.8 125.45,53.225 125.875,52.8 126.4,52.8 v1(126.8,52.4)
DDR2.DDR_A1: DDR.H3 FPGA.J6 | length 33
  Top Layer w0.2: DDR.H3@123.2,52 v1(123.6,52.4)
  Top Layer w0.254: v1(124.168,79.604) FPGA.J6@124.568,80.004
  Layer4 w0.1: v1(123.6,52.4) 123.75,52.4 123.675,52.475 123.225,52.925 123.225,58.225 122.45,59 122.45,75.025 122.15,75.325 122.15,77.45 122,77.6 121.525,77.6 121.4,77.725 121.4,79.775 121.675,80.05 123.722,80.05 v1(124.168,79.604)
DDR2.DDR_A2: DDR.H7 FPGA.H5 | length 29.3
  Top Layer w0.2: v1(126,52.4) DDR.H7@126.4,52
  Top Layer w0.254: v1(123.368,78.804) FPGA.H5@123.768,79.204
  Layer5 w0.1: v1(123.368,78.804) v1@123.446,78.804
  Layer4 w0.1: v1(123.368,78.804) 123.396,78.804 123.8,78.4 124.475,78.4 124.925,77.95 124.925,53.175 125.675,52.425 v1@125.975,52.425
DDR2.DDR_A3: DDR.J2 FPGA.L7 | length 32.9
  Top Layer w0.2: DDR.J2@122.4,51.2 v1(122.8,51.6)
  Top Layer w0.254: FPGA.L7@126.168,80.804 v1(126.568,80.404)
  Layer5 w0.1: v1@122.775,51.625 v1@122.775,51.65 ; v1(122.8,51.6) 122.85,51.6 123.2,51.95 123.2,75.15 122.95,75.4 122.95,77.475 123.1,77.625 124.35,77.625 125.05,78.325 125.05,79.525 125.5,79.975 126.139,79.975 v1(126.568,80.404)
DDR2.DDR_A4: DDR.J3 FPGA.F3 | length 28.2
  Top Layer w0.2: DDR.J3@123.2,51.2 v1(123.6,51.6)
  Top Layer w0.254: v1(121.768,77.204) FPGA.F3@122.168,77.604
  Layer4 w0.1: v1@121.75,77.2 121.375,76.825 121.375,75.5 122.075,74.8 122.075,58.275 122.375,57.975 122.375,52.15 122.55,51.975 123.225,51.975 v1(123.6,51.6)
DDR2.DDR_A5: DDR.J7 FPGA.H4 | length 29.2
  Top Layer w0.2: v1(126,51.6) DDR.J7@126.4,51.2
  Top Layer w0.254: v1(123.368,78.004) FPGA.H4@123.768,78.404
  Layer4 w0.1: v1(123.368,78.004) 123.772,77.6 124.55,77.6 124.525,77.575 124.525,52.975 125.9,51.6 v1(126,51.6)
DDR2.DDR_A6: DDR.J8 FPGA.H3 | length 28.6
  Top Layer w0.2: v1(126.8,51.6) DDR.J8@127.2,51.2
  Top Layer w0.254: v1(123.368,77.204) FPGA.H3@123.768,77.604
  Layer5 w0.1: v1@123.375,77.25 123.394,77.231 123.775,76.85 123.775,60.475 124.95,59.3 124.95,52.725 125.675,52 126.4,52 v1(126.8,51.6)
DDR2.DDR_A7: DDR.K2 FPGA.H6 | length 32.5
  Top Layer w0.2: DDR.K2@122.4,50.4 v1(122.8,50.8)
  Top Layer w0.254: v1(123.368,79.604) FPGA.H6@123.768,80.004
  Layer5 w0.1: v1(122.8,50.8) 121.55,52.05 121.55,57.425 121.25,57.725 121.25,72.987 121.35,73.087 121.35,78.375 121.575,78.6 122.175,78.6 122.325,78.45 122.825,78.45 122.975,78.6 122.975,79.211 v1(123.368,79.604) ; v1@122.825,50.8 v1@122.9,50.8
DDR2.DDR_A8: DDR.K8 FPGA.D2 | length 34
  Top Layer w0.2: v1(126.8,50.8) DDR.K8@127.2,50.4
  Top Layer w0.254: v1(120.168,76.404) FPGA.D2@120.568,76.804
  Layer5 w0.1: v1@120.225,76.35 120.168,76.35 120.125,76.35 119.75,75.975 119.75,52.5 122.725,49.525 125.525,49.525 v1(126.8,50.8)
DDR2.DDR_A9: DDR.K3 FPGA.D1 | length 28.9
  Top Layer w0.2: DDR.K3@123.2,50.4 v1(123.6,50.8)
  Top Layer w0.254: v1(120.168,75.604) FPGA.D1@120.568,76.004
  Layer4 w0.1: v1(120.168,75.604) 120.168,52.207 121.95,50.425 123.225,50.425 v1(123.6,50.8)
DDR2.DDR_A10: DDR.H2 FPGA.F4 | length 27.2
  Top Layer w0.2: DDR.H2@122.4,52 v1(122.8,52.4)
  Top Layer w0.254: v1(121.768,78.004) FPGA.F4@122.168,78.404
  Layer5 w0.1: v1@121.775,78.025 121.782,78.018 122.2,77.6 122.2,60.85 122.4,60.65 122.4,52.8 v1(122.8,52.4)
DDR2.DDR_A11: DDR.K7 FPGA.D3 | length 32
  Top Layer w0.2: v1(126,50.8) DDR.K7@126.4,50.4
  Top Layer w0.254: v1(120.168,77.204) FPGA.D3@120.568,77.604
  Layer4 w0.1: v1(120.168,77.204) 120.54,76.832 120.54,52.76 122.1,51.2 125.125,51.2 125.525,50.8 v1(126,50.8)
DDR2.DDR_A12: DDR.L2 FPGA.G6 | length 33.2
  Top Layer w0.2: DDR.L2@122.4,49.6 v1(122.8,50)
  Top Layer w0.254: v1(122.568,79.604) FPGA.G6@122.968,80.004
  Layer5 w0.1: v1(122.568,79.604) 122.329,79.604 121.975,79.25 120.825,79.25 120.6,79.025 120.6,52.2 v1@122.775,50.025
DDR2.DDR_A13: DDR.L8 FPGA.F6 | length 33.4
  Top Layer w0.2: v1(126.8,50) DDR.L8@127.2,49.6
  Top Layer w0.254: v1(121.768,79.604) FPGA.F6@122.168,80.004
  Layer4 w0.1: v1(121.768,79.604) 122.17,79.202 122.17,78.555 122.336,78.389 122.736,78.389 122.95,78.175 122.95,59.225 124.1,58.075 124.1,52.75 125.65,51.2 126.225,51.2 126.4,51.025 126.4,50.4 v1(126.8,50) v1@126.812,49.987
DDR2.DDR_BA0: DDR.G2 FPGA.F2 | length 31.6
  Top Layer w0.2: DDR.G2@122.4,52.8 v1(122.8,53.2)
  Top Layer w0.254: v1(121.768,76.404) FPGA.F2@122.168,76.804
  Layer3 w0.1: v1@121.775,76.375 121.768,76.375 121.675,76.375 121.35,76.05 121.35,75.2 119.675,73.525 119.675,63.425 ccw(c119.675,63.225) 119.675,63.025 cw(c119.675,62.825) 119.675,62.625 ccw(c119.675,62.425) 119.675,62.225 cw(c119.675,62.025) 119.675,61.825 ccw(c119.675,61.625) 119.675,61.425 cw(c119.675,61.225) 119.675,61.025 ccw(c119.675,60.825) 119.675,60.625 cw(c119.675,60.425) 119.675,60.225 ccw(c119.675,60.025) 119.675,59.825 cw(c119.675,59.625) 119.675,59.425 ccw(c119.675,59.225) 119.675,59.025 cw(c119.675,58.825) 119.675,58.625 ccw(c119.675,58.425) 119.675,58.225 cw(c119.675,58.025) 119.675,57.825 ccw(c119.675,57.625) 119.675,57.425 cw(c119.675,57.225) 119.675,57.025 ccw(c119.675,56.825) 119.675,56.625 cw(c119.675,56.425) 119.675,56.225 ccw(c119.675,56.025) 119.675,55.825 119.675,55 120.75,53.925 122,53.925 122.725,53.2 v1(122.8,53.2)
DDR2.DDR_BA1: DDR.G3 FPGA.F1 | length 30.3
  Top Layer w0.1: DDR.G3@123.2,52.8 v1(123.6,53.2)
  Top Layer w0.254: v1@121.8,75.636 FPGA.F1@122.168,76.004
  Layer3 w0.1: v1(121.768,75.65) 121.775,75.643 121.775,74.725 120.65,73.6 120.65,64.05 ccw(c120.65,63.85) 120.65,63.65 cw(c120.592,63.45) 120.65,63.25 ccw(c120.65,63.05) 120.65,62.85 cw(c120.592,62.65) 120.65,62.45 ccw(c120.65,62.25) 120.65,62.05 cw(c120.592,61.85) 120.65,61.65 ccw(c120.65,61.45) 120.65,61.25 cw(c120.592,61.05) 120.65,60.85 ccw(c120.65,60.65) 120.65,60.45 cw(c120.592,60.25) 120.65,60.05 ccw(c120.65,59.85) 120.65,59.65 cw(c120.592,59.45) 120.65,59.25 ccw(c120.65,59.05) 120.65,58.85 cw(c120.592,58.65) 120.65,58.45 ccw(c120.65,58.25) 120.65,58.05 cw(c120.592,57.85) 120.65,57.65 ccw(c120.65,57.45) 120.65,57.25 cw(c120.616,57.05) 120.65,56.85 ccw(c120.65,56.65) 120.65,56.45 cw(c120.65,56.25) 120.65,56.05 ccw(c120.65,55.85) 120.65,55.65 120.65,54.8 121.825,54.8 122.2,54.425 122.925,54.425 123.2,54.15 123.2,53.7 123.6,53.3 v1(123.6,53.2)
DDR2.DDR_BA2: DDR.G1 FPGA.E1 | length 30
  Top Layer w0.2: DDR.G1@121.6,52.8 v1(122,53.2)
  Top Layer w0.254: v1(120.968,75.604) FPGA.E1@121.368,76.004
  Layer3 w0.1: v1@120.95,75.6 120.95,75.475 118.525,73.05 118.525,61.5 ccw(c118.525,61.3) 118.525,61.1 cw(c118.525,60.9) 118.525,60.7 ccw(c118.525,60.5) 118.525,60.3 cw(c118.525,60.1) 118.525,59.9 ccw(c118.525,59.7) 118.525,59.5 cw(c118.525,59.3) 118.525,59.1 ccw(c118.525,58.9) 118.525,58.7 cw(c118.525,58.5) 118.525,58.3 ccw(c118.525,58.1) 118.525,57.9 cw(c118.525,57.7) 118.525,57.5 ccw(c118.525,57.3) 118.525,57.1 cw(c118.525,56.9) 118.525,56.7 ccw(c118.525,56.5) 118.525,56.3 cw(c118.525,56.1) 118.525,55.9 118.525,55.25 120.575,53.2 v1(122,53.2)
DDR2.DDR_CASN: DDR.G7 FPGA.K5 | length 33.4
  Top Layer w0.2: v1(126,53.2) DDR.G7@126.4,52.8
  Top Layer w0.254: FPGA.K5@125.368,79.204 v1(125.768,78.804)
  Layer2 w0.1: v1@125.825,78.8 126.25,79.225 126.825,79.225 126.975,79.075 126.975,74.575 129.9,71.65 129.9,53.65 129.3,53.05 126.15,53.05 v1(126,53.2)
DDR2.DDR_CLK_N: DDR.F8 FPGA.G1 | length 25.6
  Top Layer w0.2: v1(126.8,54) DDR.F8@127.2,53.6
  Top Layer w0.254: v1(122.568,75.604) FPGA.G1@122.968,76.004
  Layer2 w0.1: v1(122.568,75.604) 122.568,74.607 122.575,74.6 122.575,67.65 126.35,63.875 126.35,63.425 cw(c126.292,63.225) 126.35,63.025 ccw(c126.35,62.825) 126.35,62.625 cw(c126.292,62.425) 126.35,62.225 ccw(c126.35,62.025) 126.35,61.825 cw(c126.292,61.625) 126.35,61.425 ccw(c126.35,61.225) 126.35,61.025 126.35,54.45 v1(126.8,54)
DDR2.DDR_CLK_P: DDR.E8 FPGA.G3 | length 25.6
  Top Layer w0.2: v1(126.8,54.8) DDR.E8@127.2,54.4
  Top Layer w0.254: v1(122.568,77.204) FPGA.G3@122.968,77.604
  Layer2 w0.1: v1(122.568,77.204) 122.975,76.797 122.975,67.95 126.9,64.025 126.9,58.425 127.225,58.1 127.225,55.225 v1(126.8,54.8)
DDR2.DDR_CLKE: DDR.F2 FPGA.H7 | length 31.4
  Top Layer w0.2: DDR.F2@122.4,53.6 v1(122.8,54)
  Top Layer w0.254: v1(123.368,80.404) FPGA.H7@123.768,80.804
  Layer2 w0.1: v1(122.8,54) 123.2,53.6 123.975,53.6 124.65,54.275 124.65,64.825 122.2,67.275 122.2,79.875 122.3,79.975 122.939,79.975 v1(123.368,80.404)
DDR2.DDR_DQ0: DDR.C8 FPGA.L2 | length 22.1
  Top Layer w0.2: v1(126.8,56.4) DDR.C8@127.2,56
  Top Layer w0.254: FPGA.L2@126.168,76.804 v1(126.568,76.404)
  Layer3 w0.1: v1(126.568,76.404) 126.16,75.996 126.16,75.26 125.8,74.9 125.8,56.99 126.39,56.4 v1(126.8,56.4)
DDR2.DDR_DQ1: DDR.C2 FPGA.J3 | length 22.8
  Top Layer w0.2: DDR.C2@122.4,56 v1(122.8,56.4)
  Top Layer w0.254: v1(124.168,77.204) FPGA.J3@124.568,77.604
  Layer3 w0.1: v1(122.8,56.4) 122.375,56.825 122.375,70.355 123.695,71.675 123.695,71.695 ; 123.7,71.7 123.75,71.75 ; 123.75,76.786 v1(124.168,77.204) ; 123.76,71.725 123.76,76.761
DDR2.DDR_DQ2: DDR.D7 FPGA.K2 | length 23.7
  Top Layer w0.2: v1(126,55.6) DDR.D7@126.4,55.2
  Top Layer w0.254: FPGA.K2@125.368,76.804 v1(125.768,76.404)
  Layer3 w0.1: v1(125.768,76.404) 125,75.636 125,62.6 124.4,62 124.4,56.3 125.1,55.6 v1(126,55.6)
DDR2.DDR_DQ3: DDR.D3 FPGA.J1 | length 21.7
  Top Layer w0.2: DDR.D3@123.2,55.2 v1(123.6,55.6)
  Top Layer w0.254: v1(124.168,75.604) FPGA.J1@124.568,76.004
  Layer3 w0.1: 123.2,70.4 124.2,71.4 ; 123.2,70.41 123.2,56 v1(123.6,55.6) ; v1(124.168,75.604) v1@124.2,75.572 ; 124.2,71.363 v1@124.2,75.525
DDR2.DDR_DQ4: DDR.D1 FPGA.H1 | length 22.2
  Top Layer w0.2: v1(121.2,55.2) DDR.D1@121.6,55.2
  Top Layer w0.254: v1(123.368,75.604) FPGA.H1@123.768,76.004
  Layer3 w0.1: v1(121.2,55.2) 121.6,55.6 121.6,56 121.95,56.35 121.95,71.15 123.35,72.55 v1@123.35,75.586
DDR2.DDR_DQ5: DDR.D9 FPGA.K1 | length 23.6
  Top Layer w0.2: v1(127.6,55.6) DDR.D9@128,55.2
  Top Layer w0.254: FPGA.K1@125.368,76.004 v1(125.768,75.604)
  Layer3 w0.1: v1@125.75,75.6 125.4,75.25 125.4,61.638 125,61.238 125,56.3 125.3,56 127.2,56 v1(127.6,55.6)
DDR2.DDR_DQ6: DDR.B1 FPGA.H2 | length 21.2
  Top Layer w0.2: v1(121.2,57.2) DDR.B1@121.6,56.8
  Top Layer w0.254: v1(123.368,76.404) FPGA.H2@123.768,76.804
  Layer3 w0.1: v1(121.2,57.2) 121.2,71.49 122.925,73.215 122.925,75.975 v1@123.35,76.4
DDR2.DDR_DQ7: DDR.B9 FPGA.L1 | length 22
  Top Layer w0.2: DDR.B9@128,56.8 v1(128.4,57.2)
  Top Layer w0.254: FPGA.L1@126.168,76.004 v1(126.568,75.604)
  Layer3 w0.1: 126.57,56.8 127.725,56.8 128.125,57.2 v1(128.4,57.2) ; 126.57,56.81 126.35,57.03 126.35,74.84 126.57,75.06 v1@126.57,75.51
DDR2.DDR_DQS_N: DDR.A8 FPGA.L3 | length 23.5
  Top Layer w0.2: DDR.A8@127.2,57.6 v1(127.575,57.975)
  Top Layer w0.254: FPGA.L3@126.168,77.604 v1(126.568,77.204)
  Layer3 w0.1: v1(126.568,77.204) 127.01,76.762 127.01,75.91 127.31,75.61 127.31,75 ccw(c127.31,74.8) 127.31,74.6 cw(c127.31,74.4) 127.31,74.2 ccw(c127.31,74) 127.31,73.8 cw(c127.31,73.6) 127.31,73.4 ccw(c127.31,73.2) 127.31,73 cw(c127.31,72.8) 127.31,72.6 ccw(c127.31,72.4) 127.31,72.2 cw(c127.31,72) 127.31,71.8 ccw(c127.31,71.6) 127.31,71.4 cw(c127.31,71.2) 127.31,71 ccw(c127.31,70.8) 127.31,70.6 cw(c127.31,70.4) 127.31,70.2 127.31,58.95 127.575,58.685 v1(127.575,57.975)
DDR2.DDR_DQS_P: DDR.B7 FPGA.L4 | length 23.7
  Top Layer w0.2: DDR.B7@126.4,56.8 v1(126.8,57.2)
  Top Layer w0.254: FPGA.L4@126.168,78.404 v1@126.549,78.024
  Layer3 w0.1: v1(126.568,78.004) 126.746,78.004 127.16,77.59 127.49,77.59 127.78,77.3 127.78,76.14 128.025,75.895 128.025,57.75 127.475,57.2 v1(126.8,57.2)
DDR2.DDR_LDM: DDR.B3 FPGA.K3 | length 22
  Top Layer w0.2: DDR.B3@123.2,56.8 v1(123.6,57.2)
  Top Layer w0.254: FPGA.K3@125.368,77.604 v1(125.768,77.204)
  Layer3 w0.1: v1(123.6,57.2) 123.95,57.55 123.95,62.35 124.6,63 124.6,76.036 v1(125.768,77.204)
DDR2.DDR_ODT: DDR.F9 FPGA.K6 | length 28.3
  Top Layer w0.2: v1(127.6,54) DDR.F9@128,53.6
  Top Layer w0.254: FPGA.K6@125.368,80.004 v1(125.768,79.604)
  Layer2 w0.1: v1(125.768,79.604) 125.225,79.061 125.225,67.275 127.95,64.55 127.95,59.45 ; v1(127.6,54) 127.975,54.375 127.975,59.475